# Altium PCB PCB1.PcbDoc
Units mil, origin at the board's own origin, x right, y up, seen from the top; angles counter-clockwise.
Board outline 2730 x 1325 mil, 2 copper layers (Top Layer, Bottom Layer); 11 components, 8 nets, 28 pads, 0 vias.
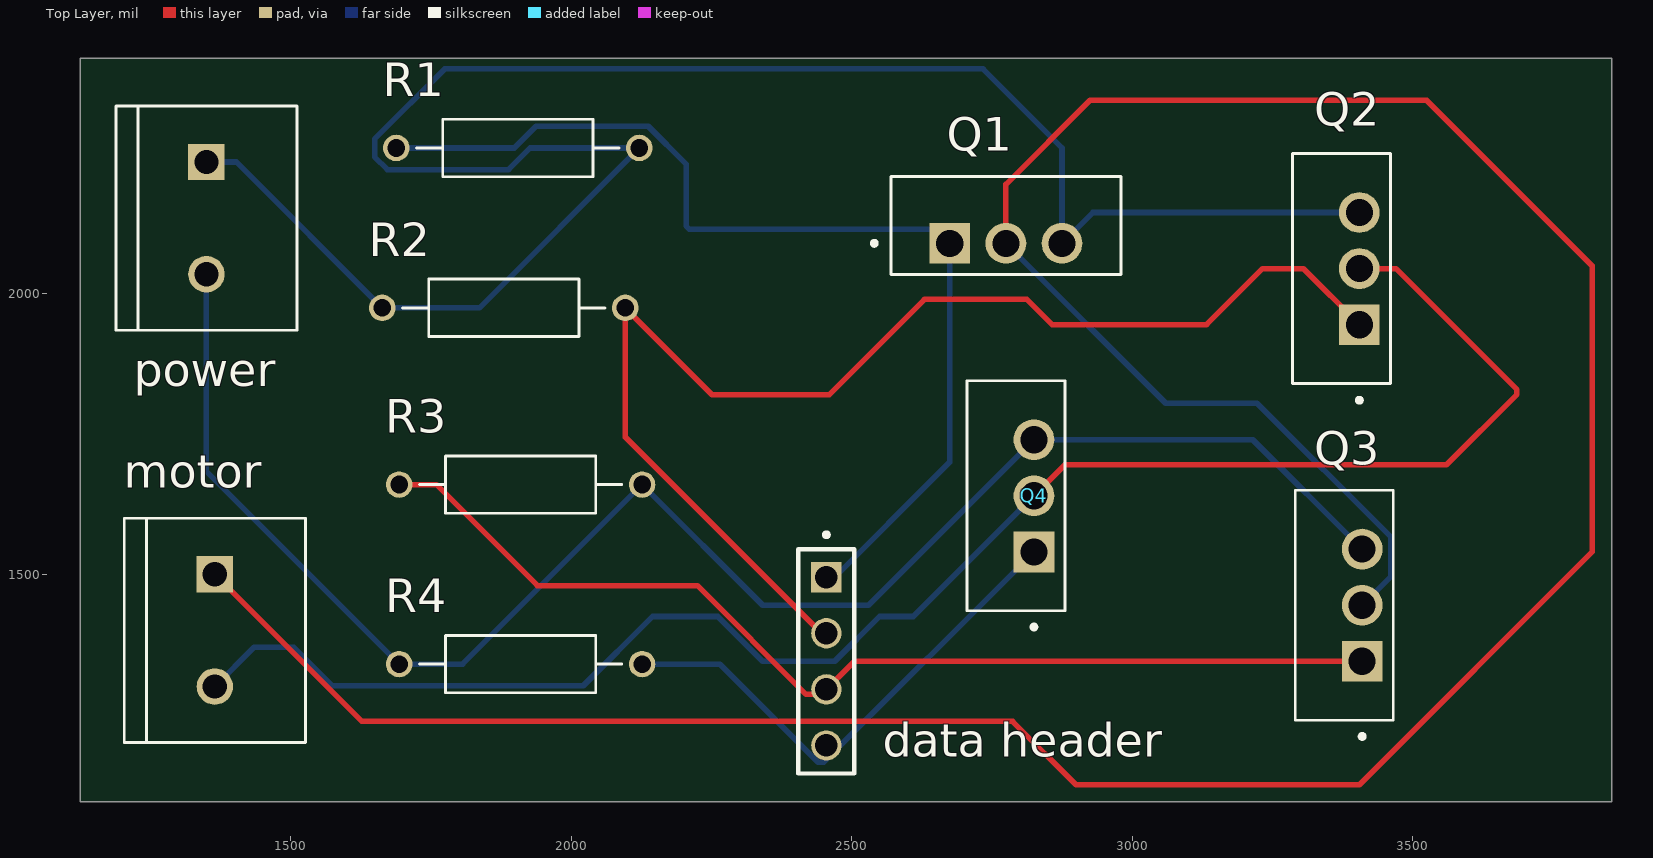
[diagram p0: Top Layer view]
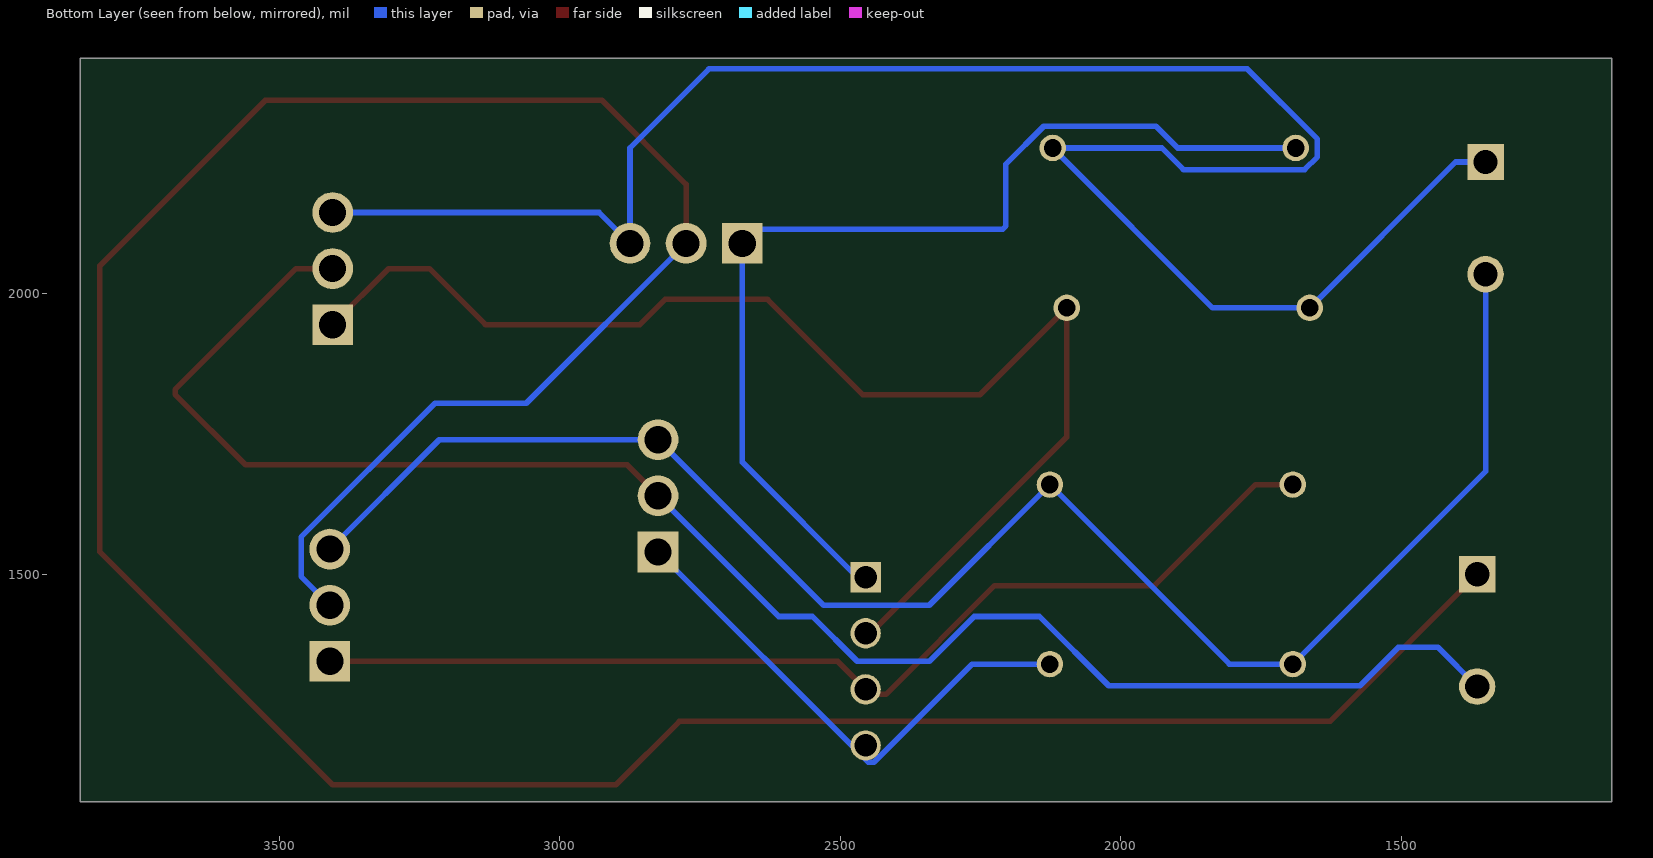
[diagram p1: Bottom Layer view, seen from below]
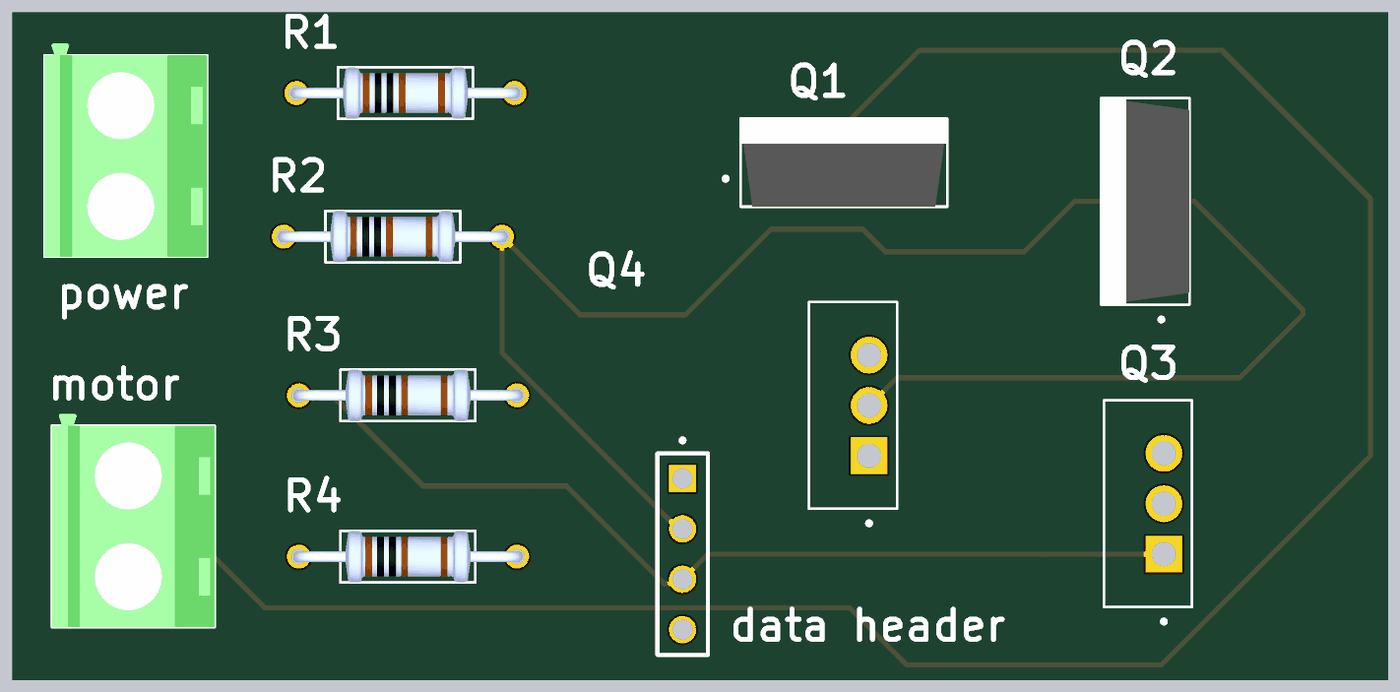
[diagram p2: 3D render of the assembled board from above, using the file's embedded part models]

## Layer stack, top to bottom
Top Solder: solder mask 0.4, Solder Resist, Dk 3.5
Top Layer: signal copper 1.4
Dielectric 1: dielectric 12.6, FR-4, Dk 4.8
Bottom Layer: signal copper 1.4
Bottom Solder: solder mask 0.4, Solder Resist, Dk 3.5

## Board outline
1125,1095 3855,1095 3855,2420 1125,2420

## Design rules (kind name [scope] priority, off if disabled: settings)
Clearance [All] p1: gap=10 ignorepadtopadclearanceinfootprint=FALSE except(0: Arc-Hole Track-Hole SMDPad-Hole THPad-Hole Via-Hole Fill-Hole Poly-Hole Region-Hole Text-Hole)
PolygonConnect [All] p1: connectstyle=Relief reliefconductorwidth=10 reliefentries=4 polygonreliefangle="90 Angle" airgapwidth=10
RoutingVias [All] p1: holewidth=28 width=50 viastyle="Through Hole" minholewidth=28 minwidth=50 maxholewidth=28 maxwidth=50
SolderMaskExpansion [All] p1: expansion=4 istentingtop=FALSE
Width [All] p1: maxlimit=10 minlimit=10 preferedwidth=10
30 further rules are at their usual default settings.

## Components (designator, comment, footprint, x,y, rotation, side; value= is the part's Value field where it differs from the comment)
"data header" "MTSW-104-06-T-S-115" SAMTEC_MTSW-104-06-T-S-115 2455,1345 r90 top
motor "282837-2" TE_282837-2 1365,1400 r270 top
power "282837-2" TE_282837-2 1350,2135 r270 top
Q1 "IRF9540N" TO254P1041X444X1930-3 2775,2121.89 r0 top
Q2 "IRF9540N" TO254P1041X444X1930-3 3373.11,2045 r90 top
Q3 "IRF540N" TO254P1054X469X1930-3 3378.09,1445 r90 top
Q4 "IRF540N" TO254P1054X469X1930-3 2793.09,1640 r90 top
R1 "pull up res" RESAD1100W55L680D260 1905,2260 r0 top
R2 "pull up rs" RESAD1100W55L680D260 1880,1975 r0 top
R3 "pull down res" RESAD1100W55L680D260 1910,1660 r0 top
R4 "pull dowm res" RESAD1100W55L680D260 1910,1340 r0 top

## Footprints (in the part's own frame and the unit in brackets; to place one, negate y for a bottom-side part, rotate by r counter-clockwise, add the part's x,y. Pads: shape width x height; smd on the part's side, far side on the other; paste and mask are expansions set on the pad)
RESAD1100W55L680D260 [mm]
  round 1.2 hole 0.8: 1(-5.5,0) 2(5.5,0)
  silkscreen extent -4.58,-1.3 4.58,1.3, body extent -5.77,-1.3 5.77,1.3, height 2.6
SAMTEC_MTSW-104-06-T-S-115 [mm]
  rect 1.37x1.37 / inner round 1.37 / far side rect 1.37x1.37 hole 1.02: 01(3.81,0)
  round 1.37 hole 1.02: 02(1.27,0) 03(-1.27,0) 04(-3.81,0)
  silkscreen extent -5.08,-1.27 5.83,1.27
TE_282837-2 [mm]
  rect 1.65x1.65 / inner round 1.65 / far side rect 1.65x1.65 hole 1.1: 1(-2.54,0)
  round 1.65 hole 1.1: 2(2.54,0)
  silkscreen extent -5.08,-4.1 5.08,4.1, body extent -5.68,-4.1 5.08,4.1, height 10
TO254P1041X444X1930-3 [mm]
  rect 1.845x1.845 / inner round 1.845 / far side rect 1.845x1.845 hole 1.23: 1(-2.54,-0.81)
  round 1.845 hole 1.23: 2(0,-0.81) 3(2.54,-0.81)
  silkscreen extent -6.06,-2.22 5.21,2.22, body extent -5.21,-2.22 5.21,2.22, height 19.3
TO254P1054X469X1930-3 [mm]
  rect 1.845x1.845 / inner round 1.845 / far side rect 1.845x1.845 hole 1.23: 1(-2.54,-0.81)
  round 1.845 hole 1.23: 2(0,-0.81) 3(2.54,-0.81)
  silkscreen extent -6.04,-2.22 5.21,2.22

## Part data
"data header": Package=None, Availability=Unavailable, MP=MTSW-104-06-T-S-115, Price=None
motor power: "Ð Ð°Ð·ÑŠÐµÐ¼Ð½Ñ‹Ðµ ÐºÐ»ÐµÐ¼Ð¼Ð½Ñ‹Ðµ ÐºÐ¾Ð»Ð¾Ð´ÐºÐ¸ Ð Ð¾Ð·ÐµÑ‚ÐºÐ° 2 Ð¿Ð¾Ð»Ð¾Ð¶ÐµÐ½Ð¸Ñ 5,08 Ð¼Ð¼ ÐŸÑ€Ð¸Ð¿Ð¾Ð¹ Ð¿Ñ€ÑÐ¼Ð¾Ð¹ Ñ‡ÐµÑ€ÐµÐ· Ð¾Ñ‚Ð²ÐµÑ€ÑÑ‚Ð¸Ðµ 13,5 Ð / ÐºÐ¾Ð½Ñ‚Ð°ÐºÑ‚", Package=None, Availability="In Stock", Check_prices=https://www.snapeda.com/parts/282837-2/TE+Connectivity+AMP+Connectors/view-part/?ref=eda, MF="TE Connectivity", MP=282837-2, Price=None, Purchase-URL=https://pricing.snapeda.com/search/part/282837-2/?ref=eda, SnapEDA_Link=https://www.snapeda.com/parts/282837-2/TE+Connectivity+AMP+Connectors/view-part/?ref=snap
Q1 Q2: "P-Channel 100 V 23A (Tc) 3.1W (Ta), 110W (Tc)", Package="TO-220 Infineon", Availability="In Stock", Check_prices=https://www.snapeda.com/parts/IRF9540N/Infineon+Technologies/view-part/?ref=eda, MF="Infineon Technologies", MP=IRF9540N, Price=None, Purchase-URL=https://pricing.snapeda.com/search/part/IRF9540N/?ref=eda, SnapEDA_Link=https://www.snapeda.com/parts/IRF9540N/Infineon+Technologies/view-part/?ref=snap
Q3 Q4: "Transistor NPN MOS IRF540/IRF540N INTERNATIONAL RECTIFIER Ampere=28 V=100 TO220", Package=Package, Availability="Not in stock", Check_prices=https://www.snapeda.com/parts/IRF540N/Infineon+Technologies/view-part/?ref=eda, MF="Infineon Technologies", MP=IRF540N, Price=None, SnapEDA_Link=https://www.snapeda.com/parts/IRF540N/Infineon+Technologies/view-part/?ref=snap
R1 R2 R3 R4: library part MFR-25FBF52-10K, "10.2 kOhms Â±1% 0.25W, 1/4W Through Hole Resistor Axial - Metal Film", Package="Axial Yageo", Availability="In Stock", Check_prices=https://www.snapeda.com/parts/MFR-25FBF52-10K/Yageo/view-part/?ref=eda, MF=Yageo, MP=MFR-25FBF52-10K, Price=None, Purchase-URL=https://pricing.snapeda.com/search/part/MFR-25FBF52-10K/?ref=eda, SnapEDA_Link=https://www.snapeda.com/parts/MFR-25FBF52-10K/Yageo/view-part/?ref=snap

## Nets (pads, with @x,y where several pads share a name; then routed paths per layer and width w, separated by ;. In a path a pad name is that pad's centre, name@x,y a point inside that pad or via, vN(x,y) a via of type N, cw(c..) or ccw(c..) an arc to the next point about the centre after c; other vN are vias at no path point)
+12: power.1 Q1.3 Q2.3 R1.2 R2.1 | length 3584.3
  Bottom Layer w10: power.1 1403.46,2235 R2.1 1836.54,1975 R1.2 1927.01,2260 1888.39,2221.38 1672.47,2221.38 1649.84,2244 1649.84,2276 1774.7,2400.86 2734.14,2400.86 2875,2260 Q1.3 2930,2145 Q2.3
GND: power.2 Q3.3 Q4.3 R3.2 R4.1 | length 2978.4
  Bottom Layer w10: power.2 1350,1683.46 R4.1 1806.54,1340 R3.2 2341.61,1444.92 2529.92,1444.92 Q4.3 3215,1740 Q3.3
"INT 1": "data header.01" Q1.1 R1.1 | length 1854.7
  Bottom Layer w10: R1.1 1898.73,2260 1937.35,2298.62 2137.53,2298.62 2205,2231.16 2205,2120.86 2210.86,2115 2650,2115 Q1.1 2675,1700 2455,1480
"INT 2": "data header.02" Q2.1 R2.2 | length 2288
  Top Layer w10: 2455,1380 2455,1386.16 2096.54,1744.62 R2.2 2251.54,1820 2460,1820 2630,1990 2812.5,1990 2857.5,1945 3132.5,1945 3232.5,2045 3305,2045 Q2.1
M+: motor.1 Q1.2 Q3.2 | length 5672.3
  Top Layer w10: motor.1 1626.97,1238.03 2786.97,1238.03 2900,1125 3405,1125 3820,1540 3820,2050 3525,2345 2925,2345 2775,2195 Q1.2
  Bottom Layer w10: Q1.2 3060,1805 3222.58,1805 3461.32,1566.26 3461.32,1496.32 Q3.2
M-: motor.2 Q2.2 Q4.2 | length 3038.2
  Top Layer w10: Q4.2 2880,1695 3560,1695 3685.86,1820.86 3685.86,1829.14 3470,2045 Q2.2
  Bottom Layer w10: motor.2 1435,1370 1505.36,1370 1573.98,1301.38 2021.7,1301.38 2145.25,1424.92 2261.42,1424.92 2341.34,1345 2470,1345 2549.92,1424.92 2609.92,1424.92 Q4.2
"PWM 1": "data header.03" Q3.1 R3.1 | length 1895.8
  Top Layer w10: R3.1 1760,1660 1940,1480 2225,1480 2418.89,1286.11 2427.17,1286.11 2427.66,1286.59 2446.59,1286.59 2505,1345 Q3.1
"PWM 2": "data header.04" Q4.1 R4.2 | length 926.3
  Bottom Layer w10: R4.2 2265,1340 2440,1165 2450,1165 Q4.1